# EAGLE board CT_schematic (EAGLE 7.6.0)

Size 100 x 80 mm. Coordinates in mm from the lower left corner, seen from the top.
Outline: 0,0 100,0 100,80 0,80 0,0
Copper layers (1*16): Top 0.035mm / dielectric 1.5mm / Bottom 0.035mm
Design rules "default": minimum track width 10mil, minimum drill 24mil, track to track 8mil, track to pad 8mil, pad to pad 8mil, via to via 8mil, smd to smd 8mil, copper to edge 40mil, drill to drill 8mil, minimum pad ring 10mil, minimum via ring 8mil, stop-mask expansion 4mil, vias tented up to drill 0mil, thermal gap 10mil

## Footprints (pad centres in the part's own frame; a part is rotated, then mirrored left to right if it is on the bottom)
C0603 = smd 0.8 x 0.8: 1 -0.762,0; 2 0.762,0
C0402 = smd 0.5 x 0.5: 1 -0.508,0; 2 0.508,0
C1210 = smd 1.2 x 2.5: 1 -1.524,0; 2 1.524,0
C1206 = smd 1.3 x 1.6: 1 -1.524,0; 2 1.524,0
EXV-9H = smd 3.505 x 1.676: 1 -2.857,0; 2 2.857,0
L0603 = smd 0.8 x 0.8: 1 -0.762,0; 2 0.762,0
R0603 = smd 0.8 x 0.8: 1 -0.762,0; 2 0.762,0
DR1040 = smd 1.6 x 3.2: 1 -4.458,0; 2 4.458,0
PJ-037B_PACKAGE = drill 3.7 square: 1 12,0 | drill 3.2 square: 2 6,0
UFBGA176_25 = smd 0.3 x 0.3: A1 -4.55,4.55; A2 -3.9,4.55; A3 -3.25,4.55; A4 -2.6,4.55; A5 -1.95,4.55; A6 -1.3,4.55; A7 -0.65,4.55; A8 0,4.55; A9 0.65,4.55; A10 1.3,4.55; A11 1.95,4.55; A12 2.6,4.55; A13 3.25,4.55; A14 3.9,4.55; A15 4.55,4.55; B1 -4.55,3.9; B2 -3.9,3.9; B3 -3.25,3.9; B4 -2.6,3.9; B5 -1.95,3.9; B6 -1.3,3.9; B7 -0.65,3.9; B8 0,3.9; B9 0.65,3.9; B10 1.3,3.9; B11 1.95,3.9; B12 2.6,3.9; B13 3.25,3.9; B14 3.9,3.9; B15 4.55,3.9; C1 -4.55,3.25; C2 -3.9,3.25; C3 -3.25,3.25; C4 -2.6,3.25; C5 -1.95,3.25; C6 -1.3,3.25; C7 -0.65,3.25; C8 0,3.25; C9 0.65,3.25; C10 1.3,3.25; C11 1.95,3.25; C12 2.6,3.25; C13 3.25,3.25; C14 3.9,3.25; C15 4.55,3.25; D1 -4.55,2.6; D2 -3.9,2.6; D3 -3.25,2.6; D4 -2.6,2.6; D5 -1.95,2.6; D6 -1.3,2.6; D7 -0.65,2.6; D8 0,2.6; D9 0.65,2.6; D10 1.3,2.6; D11 1.95,2.6; D12 2.6,2.6; D13 3.25,2.6; D14 3.9,2.6; D15 4.55,2.6; E1 -4.55,1.95; E2 -3.9,1.95; E3 -3.25,1.95; E4 -2.6,1.95; E12 2.6,1.95; E13 3.25,1.95; E14 3.9,1.95; E15 4.55,1.95; F1 -4.55,1.3; F2 -3.9,1.3; F3 -3.25,1.3; F4 -2.6,1.3; F6 -1.3,1.3; F7 -0.65,1.3; F8 0,1.3; F9 0.65,1.3; F10 1.3,1.3; F12 2.6,1.3; F13 3.25,1.3; F14 3.9,1.3; F15 4.55,1.3; G1 -4.55,0.65; G2 -3.9,0.65; G3 -3.25,0.65; G4 -2.6,0.65; G6 -1.3,0.65; G7 -0.65,0.65; G8 0,0.65; G9 0.65,0.65; G10 1.3,0.65; G12 2.6,0.65; G13 3.25,0.65; G14 3.9,0.65; G15 4.55,0.65; H1 -4.55,0; H2 -3.9,0; H3 -3.25,0; H4 -2.6,0; H6 -1.3,0; H7 -0.65,0; H8 0,0; H9 0.65,0; H10 1.3,0; H12 2.6,0; H13 3.25,0; H14 3.9,0; H15 4.55,0; J1 -4.55,-0.65; J2 -3.9,-0.65; J3 -3.25,-0.65; J4 -2.6,-0.65; J6 -1.3,-0.65; J7 -0.65,-0.65; J8 0,-0.65; J9 0.65,-0.65; J10 1.3,-0.65; J12 2.6,-0.65; J13 3.25,-0.65; J14 3.9,-0.65; J15 4.55,-0.65; K1 -4.55,-1.3; K2 -3.9,-1.3; K3 -3.25,-1.3; K4 -2.6,-1.3; K6 -1.3,-1.3; K7 -0.65,-1.3; K8 0,-1.3; K9 0.65,-1.3; K10 1.3,-1.3; K12 2.6,-1.3; K13 3.25,-1.3; K14 3.9,-1.3; K15 4.55,-1.3; L1 -4.55,-1.95; L2 -3.9,-1.95; L3 -3.25,-1.95; L4 -2.6,-1.95; L12 2.6,-1.95; L13 3.25,-1.95; L14 3.9,-1.95; L15 4.55,-1.95; M1 -4.55,-2.6; M2 -3.9,-2.6; M3 -3.25,-2.6; M4 -2.6,-2.6; M5 -1.95,-2.6; M6 -1.3,-2.6; M7 -0.65,-2.6; M8 0,-2.6; M9 0.65,-2.6; M10 1.3,-2.6; M11 1.95,-2.6; M12 2.6,-2.6; M13 3.25,-2.6; M14 3.9,-2.6; M15 4.55,-2.6; N1 -4.55,-3.25; N2 -3.9,-3.25; N3 -3.25,-3.25; N4 -2.6,-3.25; N5 -1.95,-3.25; N6 -1.3,-3.25; N7 -0.65,-3.25; N8 0,-3.25; N9 0.65,-3.25; N10 1.3,-3.25; N11 1.95,-3.25; N12 2.6,-3.25; N13 3.25,-3.25; N14 3.9,-3.25; N15 4.55,-3.25; P1 -4.55,-3.9; P2 -3.9,-3.9; P3 -3.25,-3.9; P4 -2.6,-3.9; P5 -1.95,-3.9; P6 -1.3,-3.9; P7 -0.65,-3.9; P8 0,-3.9; P9 0.65,-3.9; P10 1.3,-3.9; P11 1.95,-3.9; P12 2.6,-3.9; P13 3.25,-3.9; P14 3.9,-3.9; P15 4.55,-3.9; R1 -4.55,-4.55; R2 -3.9,-4.55; R3 -3.25,-4.55; R4 -2.6,-4.55; R5 -1.95,-4.55; R6 -1.3,-4.55; R7 -0.65,-4.55; R8 0,-4.55; R9 0.65,-4.55; R10 1.3,-4.55; R11 1.95,-4.55; R12 2.6,-4.55; R13 3.25,-4.55; R14 3.9,-4.55; R15 4.55,-4.55
ARDUCAM = drill 1 pad 1.8 square: 1 0,0 | drill 1 pad 1.8: 2 0,2.54; 3 2.54,0; 4 2.54,2.54; 5 5.08,0; 6 5.08,2.54; 7 7.62,0; 8 7.62,2.54; 9 10.16,0; 10 10.16,2.54; 11 12.7,0; 12 12.7,2.54; 13 15.24,0; 14 15.24,2.54; 15 17.78,0; 16 17.78,2.54; 17 20.32,0; 18 20.32,2.54; 19 22.86,0; 20 22.86,2.54
TDFN-8/6MM = smd 0.3 x 0.75: 1 0,0; 2 0.5,0; 3 1,0; 4 1.5,0; 5 1.5,3; 6 1,3; 7 0.5,3; 8 0,3
VFBGA-63 = smd 0.4 x 0.4: A1 -3.6,4.4; A2 -2.8,4.4; A9 2.8,4.4; A10 3.6,4.4; B1 -3.6,3.6; B9 2.8,3.6; B10 3.6,3.6; C3 -2,2.8; C4 -1.2,2.8; C5 -0.4,2.8; C6 0.4,2.8; C7 1.2,2.8; C8 2,2.8; D3 -2,2; D4 -1.2,2; D5 -0.4,2; D6 0.4,2; D7 1.2,2; D8 2,2; E3 -2,1.2; E4 -1.2,1.2; E5 -0.4,1.2; E6 0.4,1.2; E7 1.2,1.2; E8 2,1.2; F3 -2,0.4; F4 -1.2,0.4; F5 -0.4,0.4; F6 0.4,0.4; F7 1.2,0.4; F8 2,0.4; G3 -2,-0.4; G4 -1.2,-0.4; G5 -0.4,-0.4; G6 0.4,-0.4; G7 1.2,-0.4; G8 2,-0.4; H3 -2,-1.2; H4 -1.2,-1.2; H5 -0.4,-1.2; H6 0.4,-1.2; H7 1.2,-1.2; H8 2,-1.2; J3 -2,-2; J4 -1.2,-2; J5 -0.4,-2; J6 0.4,-2; J7 1.2,-2; J8 2,-2; K3 -2,-2.8; K4 -1.2,-2.8; K5 -0.4,-2.8; K6 0.4,-2.8; K7 1.2,-2.8; K8 2,-2.8; L1 -3.6,-3.6; L2 -2.8,-3.6; L9 2.8,-3.6; L10 3.6,-3.6; M1 -3.6,-4.4; M2 -2.8,-4.4; M9 2.8,-4.4; M10 3.6,-4.4
RTL8201FL-VB-CG = smd 0.27 x 1: 1 0,0; 2 0.5,0; 3 1,0; 4 1.5,0; 5 2,0; 6 2.5,0; 7 3,0; 8 3.5,0; 9 4,0; 10 4.5,0; 11 5,0; 12 5.5,0; 25 5.5,8; 26 5,8; 27 4.5,8; 28 4,8; 29 3.5,8; 30 3,8; 31 2.5,8; 32 2,8; 33 1.5,8; 34 1,8; 35 0.5,8; 36 0,8 | smd 1 x 0.27: 13 6.75,1.25; 14 6.75,1.75; 15 6.75,2.25; 16 6.75,2.75; 17 6.75,3.25; 18 6.75,3.75; 19 6.75,4.25; 20 6.75,4.75; 21 6.75,5.25; 22 6.75,5.75; 23 6.75,6.25; 24 6.75,6.75; 37 -1.25,6.75; 38 -1.25,6.25; 39 -1.25,5.75; 40 -1.25,5.25; 41 -1.25,4.75; 42 -1.25,4.25; 43 -1.25,3.75; 44 -1.25,3.25; 45 -1.25,2.75; 46 -1.25,2.25; 47 -1.25,1.75; 48 -1.25,1.25
7498011122R = smd 0.71 x 2.29: 1 -3.545,-3.18; 2 -2.525,-3.18; 3 -1.505,-3.18; 4 -0.485,-3.18; 5 0.535,-3.18; 6 1.555,-3.18; 8 3.595,-3.18; 9 5.635,-3.18; 10 6.655,-3.18; 11 -6.605,-3.18; 12 -5.585,-3.18 | smd 1.4 x 2.54: 13 -8.51,10.2; 14 8.51,10.2 | hole 1.4: -3.5,0; 3.5,0
SOIC-8 = smd 1.6 x 0.6: 1 -2.7,1.905 | smd 1.55 x 0.6: 2 -2.7,0.635; 3 -2.7,-0.635; 4 -2.7,-1.905; 5 2.7,-1.905; 6 2.7,-0.635; 7 2.7,0.635; 8 2.7,1.905
182-009-MALE = drill 1.194 pad 1.524 octagon: 1 -5.537,10.923; 2 -2.769,10.923; 3 0,10.923; 4 2.769,10.923; 5 5.537,10.923; 6 -4.153,8.08; 7 -1.384,8.08; 8 1.384,8.08; 9 4.153,8.08 | hole 3.048: -12.446,9.501; 12.446,9.501
ABS07-32.768KHZ-7-T = smd 1.1 x 2.4: 1 -2.5,0; 2 0,0
ABLS-25.000MHZ-B2F-T = smd 5.6 x 2.8: 1 -3.81,0; 2 5.69,0
ASFL1 = smd 1.7 x 1.5: 1 -1.27,-1.1; 2 1.27,-1.1; 3 1.27,1.1; 4 -1.27,1.1
IDT74FCT38072 = smd 0.51 x 1: 1 0,0; 2 1.27,0; 3 2.54,0; 4 3.81,0; 5 3.81,4.95; 6 2.54,4.95; 7 1.27,4.95; 8 0,4.95
HTSSOP14 = smd 1.676 x 0.356: 1 -2.8,1.95; 2 -2.8,1.3; 3 -2.8,0.65; 4 -2.8,0; 5 -2.8,-0.65; 6 -2.8,-1.3; 7 -2.8,-1.95; 8 2.8,-1.95; 9 2.8,-1.3; 10 2.8,-0.65; 11 2.8,0; 12 2.8,0.65; 13 2.8,1.3; 14 2.8,1.95 | smd 3 x 5: 15 0,0 | drill 0.4 pad 0.45: P$1 -0.75,1.5; P$2 0.75,1.5; P$3 -0.75,0; P$4 0.8,0; P$5 -0.75,-1.5; P$6 0.9,-1.5
WSON-8 = smd 0.3 x 0.6: 1 -0.75,0; 2 0.05,0; 3 0.85,0; 4 1.65,0; 5 1.65,3.8; 6 0.85,3.8; 7 0.05,3.8; 8 -0.75,3.8 | smd 3 x 2.6: PAD 0.45,1.9
SON-6 = smd 0.55 x 0.3: 1 -0.355,0.5 | smd 0.52 x 0.3: 2 -0.37,0; 3 -0.37,-0.5; 4 0.37,-0.5; 5 0.37,0; 6 0.37,0.5
PW0020A = smd 1.35 x 0.35: 1 -2.85,2.925; 2 -2.85,2.275; 3 -2.85,1.625; 4 -2.85,0.975; 5 -2.85,0.325; 6 -2.85,-0.325; 7 -2.85,-0.975; 8 -2.85,-1.625; 9 -2.85,-2.275; 10 -2.85,-2.925; 11 2.85,-2.925; 12 2.85,-2.275; 13 2.85,-1.625; 14 2.85,-0.975; 15 2.85,-0.325; 16 2.85,0.325; 17 2.85,0.975; 18 2.85,1.625; 19 2.85,2.275; 20 2.85,2.925
DCU0008A_N = smd 0.5 x 0.3: 1 -1.6,0.75; 2 -1.6,0.25; 3 -1.6,-0.25; 4 -1.6,-0.75; 5 1.6,-0.75; 6 1.6,-0.25; 7 1.6,0.25; 8 1.6,0.75
SW_4-1437565-2 = smd 1.4 x 2.1: 1 -2.23,4.55; 2 -2.23,-4.55; 3 2.23,4.55; 4 2.23,-4.55
LGM67K-G1J2-24-Z = smd 0.8 x 1.4: A -2,0; C 0,0
NC7SZ125M5X = smd 1.3 x 0.7: 1 -1.3,0.95; 2 -1.3,0; 3 -1.3,-0.95; 4 1.3,-0.95; 5 1.3,0.95
DUMMY_PACKAGE_283 = drill 0.3: 1 0,-1; 2 1.5,-1

## Placement (x,y rotation side)
C1  1e-06  [C0603]  -30.48,82.55 0 top  (outside the outline)
C2  1e-07  [C0603]  -34.29,82.55 0 top  (outside the outline)
C3  1e-07  [C0603]  -38.1,82.55 0 top  (outside the outline)
C4  1e-07  [C0603]  -41.91,82.55 0 top  (outside the outline)
C5  1e-07  [C0603]  -45.72,82.55 0 top  (outside the outline)
C6  1e-07  [C0603]  -49.53,82.55 0 top  (outside the outline)
C7  1e-07  [C0603]  -53.34,82.55 0 top  (outside the outline)
C8  1e-07  [C0603]  -57.15,82.55 0 top  (outside the outline)
C9  1e-07  [C0603]  -60.96,82.55 0 top  (outside the outline)
C10  1e-07  [C0603]  -64.77,82.55 0 top  (outside the outline)
C11  1e-07  [C0603]  -68.58,82.55 0 top  (outside the outline)
C12  1e-07  [C0603]  -72.39,82.55 0 top  (outside the outline)
C13  1e-07  [C0603]  -76.2,82.55 0 top  (outside the outline)
C14  1e-07  [C0603]  -80.01,82.55 0 top  (outside the outline)
C15  1e-07  [C0603]  -83.82,82.55 0 top  (outside the outline)
C16  1e-07  [C0603]  -87.63,82.55 0 top  (outside the outline)
C17  4.7e-06  [C0603]  -15.24,82.55 0 top  (outside the outline)
C18  1e-08  [C0603]  -91.44,82.55 0 top  (outside the outline)
C19  1e-06  [C0603]  -15.24,87.63 0 top  (outside the outline)
C20  2.2e-06  [C0603]  -19.05,82.55 0 top  (outside the outline)
C21  2.2e-06  [C0603]  -22.86,82.55 0 top  (outside the outline)
C22  1e-11  [C0402]  -27.94,92.71 0 top  (outside the outline)
C23  1e-11  [C0402]  -31.75,92.71 0 top  (outside the outline)
C24  1e-11  [C0402]  -35.56,92.71 0 top  (outside the outline)
C25  1e-11  [C0402]  -39.37,92.71 0 top  (outside the outline)
C26  1e-06  [C0603]  -19.05,87.63 0 top  (outside the outline)
C27  1e-08  [C0402]  -43.18,92.71 0 top  (outside the outline)
C28  1e-07  [C0402]  -46.99,92.71 0 top  (outside the outline)
C29  1e-07  [C0402]  -50.8,92.71 0 top  (outside the outline)
C30  1e-07  [C0402]  -54.61,92.71 0 top  (outside the outline)
C31  1e-07  [C0402]  -58.42,92.71 0 top  (outside the outline)
C32  2.2e-06  [C0603]  -26.67,82.55 0 top  (outside the outline)
C33  2.2e-08  [C0402]  -20.32,92.71 0 top  (outside the outline)
C34  1e-06  [C0603]  -22.86,87.63 0 top  (outside the outline)
C35  1e-07  [C0402]  -62.23,92.71 0 top  (outside the outline)
C36  1e-08  [C0402]  -66.04,92.71 0 top  (outside the outline)
C37  1e-06  [C0603]  -26.67,87.63 0 top  (outside the outline)
C38  1e-07  [C0402]  -69.85,92.71 0 top  (outside the outline)
C39  1e-08  [C0402]  -73.66,92.71 0 top  (outside the outline)
C40  1e-07  [C0402]  -77.47,92.71 0 top  (outside the outline)
C41  1e-07  [C0402]  -81.28,92.71 0 top  (outside the outline)
C42  1e-07  [C0402]  -85.09,92.71 0 top  (outside the outline)
C43  1e-08  [C0402]  -88.9,92.71 0 top  (outside the outline)
C44  1e-08  [C0402]  -92.71,92.71 0 top  (outside the outline)
C45  1e-08  [C0402]  -15.24,97.79 0 top  (outside the outline)
C46  1e-06  [C0603]  -30.48,87.63 0 top  (outside the outline)
C47  3.3e-09  [C0402]  -24.13,92.71 0 top  (outside the outline)
C48  1e-07  [C0402]  -19.05,97.79 0 top  (outside the outline)
C49  2.2e-05  [C1210]  -68.58,64.77 0 top  (outside the outline)
C50  2.2e-05  [C1210]  -74.93,64.77 0 top  (outside the outline)
C51  1e-05  [C1206]  -87.63,64.77 0 top  (outside the outline)
C52  1e-05  [C1206]  -16.51,72.39 0 top  (outside the outline)
C53  1e-08  [C0402]  -22.86,97.79 0 top  (outside the outline)
C54  1e-05  [C1206]  -22.86,72.39 0 top  (outside the outline)
C55  1e-05  [C1210]  -81.28,64.77 0 top  (outside the outline)
C56  1e-07  [C0402]  -26.67,97.79 0 top  (outside the outline)
C57  0.0001  [EXV-9H]  -35.56,57.15 0 top  (outside the outline)
C58  0.0001  [EXV-9H]  -46.99,57.15 0 top  (outside the outline)
C59  1e-08  [C0402]  -30.48,97.79 0 top  (outside the outline)
C60  1e-07  [C0402]  -34.29,97.79 0 top  (outside the outline)
C61  1e-08  [C0402]  -38.1,97.79 0 top  (outside the outline)
C62  1e-07  [C0402]  -41.91,97.79 0 top  (outside the outline)
C63  1e-08  [C0402]  -45.72,97.79 0 top  (outside the outline)
C64  1e-07  [C0402]  -49.53,97.79 0 top  (outside the outline)
C65  1e-08  [C0402]  -53.34,97.79 0 top  (outside the outline)
C66  1e-07  [C0402]  -57.15,97.79 0 top  (outside the outline)
C67  1e-08  [C0402]  -60.96,97.79 0 top  (outside the outline)
C68  1e-08  [C0402]  -64.77,97.79 0 top  (outside the outline)
C69  1e-08  [C0402]  -68.58,97.79 0 top  (outside the outline)
F1  240.0  [L0603]  -34.29,87.63 0 top  (outside the outline)
I1  97.0  [R0603]  -38.1,87.63 0 top  (outside the outline)
I5  2.5e-06  [DR1040]  -88.9,34.29 0 top  (outside the outline)
J1  PJ-037B  [PJ-037B_PACKAGE]  -44.45,35.56 0 top  (outside the outline)
R2  1000.0  [R0603]  -41.91,87.63 0 top  (outside the outline)
R7  4700.0  [R0603]  -45.72,87.63 0 top  (outside the outline)
R8  4700.0  [R0603]  -49.53,87.63 0 top  (outside the outline)
R9  4700.0  [R0603]  -53.34,87.63 0 top  (outside the outline)
R10  2200.0  [R0603]  -57.15,87.63 0 top  (outside the outline)
R12  2200.0  [R0603]  -60.96,87.63 0 top  (outside the outline)
R18  10000.0  [R0603]  -77.47,71.12 0 top  (outside the outline)
R19  10000.0  [R0603]  -82.55,71.12 0 top  (outside the outline)
R20  10000.0  [R0603]  -87.63,71.12 0 top  (outside the outline)
R21  10000.0  [R0603]  -92.71,71.12 0 top  (outside the outline)
R22  10000.0  [R0603]  -15.24,77.47 0 top  (outside the outline)
R23  10000.0  [R0603]  -20.32,77.47 0 top  (outside the outline)
R24  10000.0  [R0603]  -25.4,77.47 0 top  (outside the outline)
R25  10000.0  [R0603]  -30.48,77.47 0 top  (outside the outline)
R26  10000.0  [R0603]  -35.56,77.47 0 top  (outside the outline)
R27  0.1  [R0603]  -64.77,87.63 0 top  (outside the outline)
R28  0.1  [R0603]  -68.58,87.63 0 top  (outside the outline)
R29  200.0  [R0603]  -72.39,87.63 0 top  (outside the outline)
R30  200.0  [R0603]  -76.2,87.63 0 top  (outside the outline)
R31  2490.0  [R0603]  -80.01,87.63 0 top  (outside the outline)
R32  4700.0  [R0603]  -83.82,87.63 0 top  (outside the outline)
R33  10000.0  [R0603]  -40.64,77.47 0 top  (outside the outline)
R34  10000.0  [R0603]  -45.72,77.47 0 top  (outside the outline)
R35  10000.0  [R0603]  -50.8,77.47 0 top  (outside the outline)
R36  10000.0  [R0603]  -55.88,77.47 0 top  (outside the outline)
R37  10000.0  [R0603]  -60.96,77.47 0 top  (outside the outline)
R38  10000.0  [R0603]  -66.04,77.47 0 top  (outside the outline)
R39  120.0  [R0603]  -87.63,87.63 0 top  (outside the outline)
R40  100000.0  [R0603]  -46.99,71.12 0 top  (outside the outline)
R41  30000.0  [R0603]  -71.12,77.47 0 top  (outside the outline)
R42  22000.0  [R0603]  -76.2,77.47 0 top  (outside the outline)
R43  100000.0  [R0603]  -52.07,71.12 0 top  (outside the outline)
R44  2231.0  [R0603]  -91.44,87.63 0 top  (outside the outline)
R45  1000.0  [R0603]  -15.24,92.71 0 top  (outside the outline)
R46  10000.0  [R0603]  -81.28,77.47 0 top  (outside the outline)
R47  10000.0  [R0603]  -86.36,77.47 0 top  (outside the outline)
R48  82000.0  [R0603]  -91.44,77.47 0 top  (outside the outline)
R49  300000.0  [R0603]  -57.15,71.12 0 top  (outside the outline)
R50  120000.0  [R0603]  -62.23,71.12 0 top  (outside the outline)
R51  200000.0  [R0603]  -67.31,71.12 0 top  (outside the outline)
R52  200000.0  [R0603]  -72.39,71.12 0 top  (outside the outline)
U1  STM32F439IIH7  [UFBGA176_25]  -77.47,6.35 0 top  (outside the outline)
U2  arducam_ov2640  [ARDUCAM]  -40.64,63.5 0 top  (outside the outline)
U3  24AA01T-I/MNY  [TDFN-8/6MM]  -24.13,46.99 0 top  (outside the outline)
U4  mt29f4g08abbdah4  [VFBGA-63]  -58.42,34.29 0 top  (outside the outline)
U5  RTL8201FL-VB-CG  [RTL8201FL-VB-CG]  -27.94,31.75 0 top  (outside the outline)
U6  7498011122R  [7498011122R]  -22.86,7.62 0 top  (outside the outline)
U7  SN65HVD230D  [SOIC-8]  -36.83,48.26 0 top  (outside the outline)
U8  182-009-113R531  [182-009-MALE]  -55.88,6.35 0 top  (outside the outline)
U9  ABS07-32.768KHZ-7-T  [ABS07-32.768KHZ-7-T]  -88.9,57.15 0 top  (outside the outline)
U10  ABLS-25.000MHZ-B2F-T  [ABLS-25.000MHZ-B2F-T]  -66.04,57.15 0 top  (outside the outline)
U11  ASFL1-25MHZ-NCS  [ASFL1]  -74.93,46.99 0 top  (outside the outline)
U12  ASFL1-50MHZ-NCS  [ASFL1]  -91.44,46.99 0 top  (outside the outline)
U13  idt74fct38072  [IDT74FCT38072]  -29.21,54.61 0 top  (outside the outline)
U14  tps54325PWP  [HTSSOP14]  -48.26,64.77 0 top  (outside the outline)
U15  LP3878SDX-ADJ/NOPB  [WSON-8]  -58.42,45.72 0 top  (outside the outline)
U16  TPS3895ADRYR  [SON-6]  -91.44,96.52 0 top  (outside the outline)
U17  LSF0108PWR  [PW0020A]  -49.53,38.1 0 top  (outside the outline)
U18  LSF0102DCTR  [DCU0008A_N]  -86.36,96.52 0 top  (outside the outline)
U19  4-1437565-2  [SW_4-1437565-2]  -78.74,34.29 0 top  (outside the outline)
U20  Q65110A2395  [LGM67K-G1J2-24-Z]  -57.15,64.77 0 top  (outside the outline)
U21  nc7sz125m5x  [NC7SZ125M5X]  -27.94,71.12 0 top  (outside the outline)
U22  nc7sz125m5x  [NC7SZ125M5X]  -34.29,71.12 0 top  (outside the outline)
U23  nc7sz125m5x  [NC7SZ125M5X]  -40.64,71.12 0 top  (outside the outline)
U24  Dummy  [DUMMY_PACKAGE_283]  -73.66,97.79 0 top  (outside the outline)

## Library data of the parts
C1-C69 F1 I1 I5 J1 R2 R7-R10 R12 R18-R52 U1-U24 = circuit_tree

## Nets
CLK_CRYSTAL_U1_E1: C22.1 U1.E1 U9.1
CLK_CRYSTAL_U1_F1: C23.1 U1.F1 U9.2
CLK_CRYSTAL_U1_G1: C24.1 U1.G1 U10.1
CLK_CRYSTAL_U1_H1: C25.1 U1.H1 U10.2
CLK_U1_N2: U1.N2 U13.7
CLK_U2_8: U2.8 U11.3
CLK_U5_43: U5.43 U13.6
CLK_U13_3: U12.3 U13.3
GND: C1.2 C2.2 C3.2 C4.2 C5.2 C6.2 C7.2 C8.2 C9.2 C10.2 C11.2 C12.2 C13.2 C14.2 C15.2 C16.2 C17.2 C18.2 C19.2 C20.2 C21.2 C22.2 C23.2 C24.2 C25.2 C26.2 C27.2 C28.2 C29.2 C30.2 C31.2 C32.2 C33.2 C34.2 C35.2 C36.2 C37.2 C38.2 C39.2 C40.2 C41.2 C42.2 C43.2 C44.2 C45.2 C46.2 C47.2 C49.2 C50.2 C51.2 C52.2 C53.2 C54.2 C55.2 C56.2 C57.2 C58.2 C59.2 C60.2 C61.2 C62.2 C63.2 C64.2 C65.2 C66.2 C67.2 C68.2 C69.2 J1.2 R2.2 R20.2 R21.2 R27.2 R28.2 R31.2 R36.2 R37.2 R40.2 R42.2 R45.2 R48.2 R50.2 U1.D5 U1.D7 U1.D8 U1.D9 U1.F2 U1.F6 U1.F7 U1.F8 U1.F9 U1.F10 U1.F12 U1.G2 U1.G6 U1.G7 U1.G8 U1.G9 U1.G10 U1.G12 U1.H6 U1.H7 U1.H8 U1.H9 U1.H10 U1.H12 U1.J6 U1.J7 U1.J8 U1.J9 U1.J10 U1.K6 U1.K7 U1.K8 U1.K9 U1.K10 U1.M1 U1.M8 U1.M9 U1.N1 U2.2 U2.20 U3.4 U3.7 U4.C5 U4.F7 U4.K3 U4.K8 U5.7 U5.20 U5.33 U5.42 U5.47 U7.2 U8.5 U11.2 U12.2 U13.4 U13.5 U13.8 U14.5 U14.8 U14.9 U14.15 U15.3 U15.PAD U16.2 U17.1 U18.1 U20.C U21.1 U21.3 U22.1 U22.3 U23.1 U23.3 U24.1
NET_U1_A5: R10.1 U1.A5 U3.6
NET_U1_B4: R12.1 U1.B4 U3.5
NET_U1_C6: R18.1 U1.C6
NET_U1_D6: R19.1 U1.D6
NET_U1_F13: C21.1 U1.F13
NET_U1_J1: R8.1 U1.J1 U22.4
NET_U1_L4: R21.1 U1.L4
NET_U1_M3: U17.4
NET_U1_M6: R20.1 U1.M6
NET_U1_M10: C20.1 U1.M10
NET_U1_P2: U17.3
NET_U1_R1: C18.1 C19.1 F1.1 U1.P1 U1.R1
NET_U1_R14: U20.A
NET_U1_R15: U19.3 U19.4
NET_U2_19: R9.1 U2.19 U23.4
NET_U4_C3: R26.1 U4.C3
NET_U5_6: C34.1 C35.1 C36.1 I1.1 U5.6 U5.41
NET_U5_10: R36.1 U5.10
NET_U5_13: R33.1 U5.13
NET_U5_18: R37.1 U5.18
NET_U5_28: U5.28
NET_U5_29: R7.1 U5.29 U21.4
NET_U5_32: R32.1 U5.32
NET_U5_34: R34.1 U5.34
NET_U5_35: R35.1 U5.35
NET_U5_39: R38.1 U5.39
NET_U5_40: C41.1 U5.40
NET_U5_46: R31.1 U5.46
NET_U5_48: C40.1 U5.48
NET_U6_1: U5.1 U6.1
NET_U6_3: U5.2 U6.3
NET_U6_4: U5.4 U6.4
NET_U6_5: C33.1 U6.2 U6.5
NET_U6_6: U5.5 U6.6
NET_U6_8: R28.1 U6.8
NET_U6_10: R29.1 U6.10
NET_U6_12: R30.1 U6.12
NET_U6_13: R27.1 U6.13 U6.14
NET_U6_34: R29.2
NET_U6_35: R30.2
NET_U7_6: R39.2 U7.6
NET_U7_8: R40.1 U7.8
NET_U8_2: R39.2 U7.6 U8.2
NET_U8_3: R39.1 U7.7 U8.3
NET_U14_2: R41.2 R42.1 U14.2
NET_U14_3: C46.1 U14.3
NET_U14_4: C47.1 U14.4
NET_U14_10: C48.1 I5.1 U14.10 U14.11
NET_U14_12: C48.2 U14.12
NET_U15_1: C53.1 U15.1
NET_U15_6: R44.2 R45.1 U15.6
NET_U15_8: R43.1 U15.8
NET_U16_1: R47.1 R48.1 U16.1
NET_U16_3: R49.2 R50.1 U16.3
NET_U16_4: R46.1 U16.4 U21.2 U22.2 U23.2
NET_U17_20: R51.1 U17.20
NET_U18_8: R52.1 U18.8
NET_U19_1: R2.1 U19.1 U19.2
PROC_CAN1_RX_TOIOBUF: U18.4
PROC_CAN1_RX_TOXCVR: U7.4 U18.5
PROC_CAN1_TX_TOIOBUF: U18.3
PROC_CAN1_TX_TOXCVR: U7.1 U18.6
PROC_DAC_OUT2: U1.P4 U24.2
PROC_ETH_CRS_DV_TOIOBUF: U17.6
PROC_ETH_CRS_DV_TOXCVR: U5.36 U17.15
PROC_ETH_MDC_TOXCVR: U5.30 U17.17
PROC_ETH_MDIO_TOXCVR: U5.31 U17.18
PROC_ETH_RXD0_TOIOBUF: U17.8
PROC_ETH_RXD0_TOXCVR: U5.14 U17.13
PROC_ETH_RXD1_TOIOBUF: U17.10
PROC_ETH_RXD1_TOXCVR: U5.16 U17.11
PROC_ETH_TX_EN_TOIOBUF: U17.7
PROC_ETH_TX_EN_TOXCVR: U5.27 U17.14
PROC_ETH_TXD0_TOIOBUF: U17.9
PROC_ETH_TXD0_TOXCVR: U5.23 U17.12
PROC_ETH_TXD1_TOIOBUF: U17.5
PROC_ETH_TXD1_TOXCVR: U5.24 U17.16
PROC_FMC_A16: U1.N14 U4.D5
PROC_FMC_A17: U1.N13 U4.C4
PROC_FMC_D0: U1.M14 U4.H4
PROC_FMC_D1: U1.L14 U4.J4
PROC_FMC_D2: U1.B12 U4.K4
PROC_FMC_D3: U1.C12 U4.K5
PROC_FMC_D4: U1.R8 U4.K6
PROC_FMC_D5: U1.P8 U4.J7
PROC_FMC_D6: U1.P9 U4.K7
PROC_FMC_D7: U1.R9 U4.J8
PROC_FMC_INT2: R22.1 U1.J15 U4.C8
PROC_FMC_NCE2: R23.1 U1.A11 U4.C6
PROC_FMC_NOE: R25.1 U1.D10 U4.D4
PROC_FMC_NWE: R24.1 U1.C11 U4.C7
VCC_S1_7V1: C51.1 C52.1 C54.1 C57.1 C58.1 J1.1 R43.2 U14.7 U14.13 U14.14 U15.4
VCC_TIER1_1V8: C1.1 C2.1 C3.1 C4.1 C5.1 C6.1 C7.1 C8.1 C9.1 C10.1 C11.1 C12.1 C13.1 C14.1 C15.1 C16.1 C17.1 C27.1 C28.1 C29.1 C30.1 C31.1 C32.1 C49.1 C50.1 C56.1 C61.1 C62.1 C65.1 C66.1 C67.1 C68.1 C69.1 F1.2 I5.2 R8.2 R10.2 R12.2 R18.2 R19.2 R22.2 R23.2 R24.2 R25.2 R26.2 R41.1 R46.2 R47.2 R49.1 U1.C1 U1.C5 U1.C7 U1.C8 U1.C9 U1.F3 U1.G3 U1.G13 U1.H13 U1.J12 U1.J13 U1.K4 U1.N8 U1.N9 U1.N10 U3.8 U4.D3 U4.G4 U4.H8 U4.J6 U14.1 U16.6 U17.2 U18.2 U21.5 U22.5 U23.5
VCC_TIER1_3V3: C26.1 C37.1 C38.1 C39.1 C42.1 C43.1 C44.1 C45.1 C55.1 C59.1 C60.1 C63.1 C64.1 I1.2 R7.2 R9.2 R32.2 R33.2 R34.2 R35.2 R38.2 R44.1 R51.2 R52.2 U2.1 U5.15 U5.21 U5.37 U6.9 U6.11 U7.3 U11.4 U12.4 U13.1 U13.2 U15.5 U17.19 U18.7

## Tracks (layer width: path | path; a pad name or v marks a point on that pad's centre or on a via)
CLK_CRYSTAL_U1_E1  (2 unrouted)
CLK_CRYSTAL_U1_F1  (2 unrouted)
CLK_CRYSTAL_U1_G1  (2 unrouted)
CLK_CRYSTAL_U1_H1  (2 unrouted)
CLK_U1_N2  (1 unrouted)
CLK_U2_8  (1 unrouted)
CLK_U5_43  (1 unrouted)
CLK_U13_3  (1 unrouted)
GND  (156 unrouted)
NET_U1_A5  (2 unrouted)
NET_U1_B4  (2 unrouted)
NET_U1_C6  (1 unrouted)
NET_U1_D6  (1 unrouted)
NET_U1_F13  (1 unrouted)
NET_U1_J1  (2 unrouted)
NET_U1_L4  (1 unrouted)
NET_U1_M6  (1 unrouted)
NET_U1_M10  (1 unrouted)
NET_U1_R1  (4 unrouted)
NET_U1_R15  (1 unrouted)
NET_U2_19  (2 unrouted)
NET_U4_C3  (1 unrouted)
NET_U5_6  (5 unrouted)
NET_U5_10  (1 unrouted)
NET_U5_13  (1 unrouted)
NET_U5_18  (1 unrouted)
NET_U5_29  (2 unrouted)
NET_U5_32  (1 unrouted)
NET_U5_34  (1 unrouted)
NET_U5_35  (1 unrouted)
NET_U5_39  (1 unrouted)
NET_U5_40  (1 unrouted)
NET_U5_46  (1 unrouted)
NET_U5_48  (1 unrouted)
NET_U6_1  (1 unrouted)
NET_U6_3  (1 unrouted)
NET_U6_4  (1 unrouted)
NET_U6_5  (2 unrouted)
NET_U6_6  (1 unrouted)
NET_U6_8  (1 unrouted)
NET_U6_10  (1 unrouted)
NET_U6_12  (1 unrouted)
NET_U6_13  (2 unrouted)
NET_U7_6  (1 unrouted)
NET_U7_8  (1 unrouted)
NET_U8_2  (2 unrouted)
NET_U8_3  (2 unrouted)
NET_U14_2  (2 unrouted)
NET_U14_3  (1 unrouted)
NET_U14_4  (1 unrouted)
NET_U14_10  (3 unrouted)
NET_U14_12  (1 unrouted)
NET_U15_1  (1 unrouted)
NET_U15_6  (2 unrouted)
NET_U15_8  (1 unrouted)
NET_U16_1  (2 unrouted)
NET_U16_3  (2 unrouted)
NET_U16_4  (4 unrouted)
NET_U17_20  (1 unrouted)
NET_U18_8  (1 unrouted)
NET_U19_1  (2 unrouted)
PROC_CAN1_RX_TOXCVR  (1 unrouted)
PROC_CAN1_TX_TOXCVR  (1 unrouted)
PROC_DAC_OUT2  (1 unrouted)
PROC_ETH_CRS_DV_TOXCVR  (1 unrouted)
PROC_ETH_MDC_TOXCVR  (1 unrouted)
PROC_ETH_MDIO_TOXCVR  (1 unrouted)
PROC_ETH_RXD0_TOXCVR  (1 unrouted)
PROC_ETH_RXD1_TOXCVR  (1 unrouted)
PROC_ETH_TX_EN_TOXCVR  (1 unrouted)
PROC_ETH_TXD0_TOXCVR  (1 unrouted)
PROC_ETH_TXD1_TOXCVR  (1 unrouted)
PROC_FMC_A16  (1 unrouted)
PROC_FMC_A17  (1 unrouted)
PROC_FMC_D0  (1 unrouted)
PROC_FMC_D1  (1 unrouted)
PROC_FMC_D2  (1 unrouted)
PROC_FMC_D3  (1 unrouted)
PROC_FMC_D4  (1 unrouted)
PROC_FMC_D5  (1 unrouted)
PROC_FMC_D6  (1 unrouted)
PROC_FMC_D7  (1 unrouted)
PROC_FMC_INT2  (2 unrouted)
PROC_FMC_NCE2  (2 unrouted)
PROC_FMC_NOE  (2 unrouted)
PROC_FMC_NWE  (2 unrouted)
VCC_S1_7V1  (10 unrouted)
VCC_TIER1_1V8  (75 unrouted)
VCC_TIER1_3V3  (37 unrouted)